# Altium PCB PCB.PcbDoc
Units mm, origin at the board's own origin, x right, y up, seen from the top; angles counter-clockwise.
Board outline 152.4 x 101.6 mm, 4 copper layers (L1(SIG), L2(GND), L3(PWR), L4(SIG)), stack 1.565 mm thick; 92 components, 74 nets, 381 pads, 117 vias.
Unrouted connection lines stored in the file: 155.
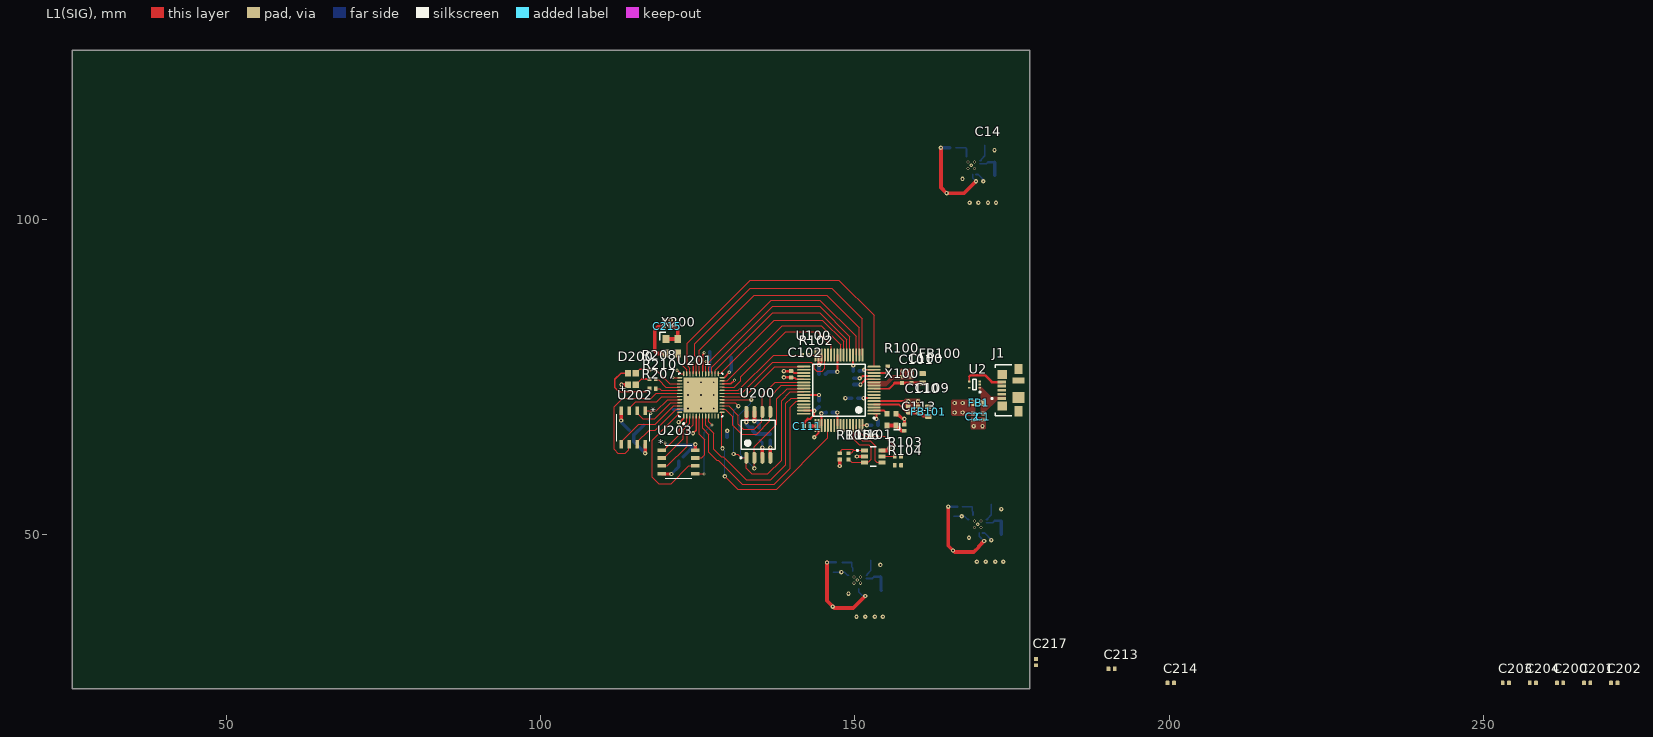
[diagram p0: L1(SIG) view]
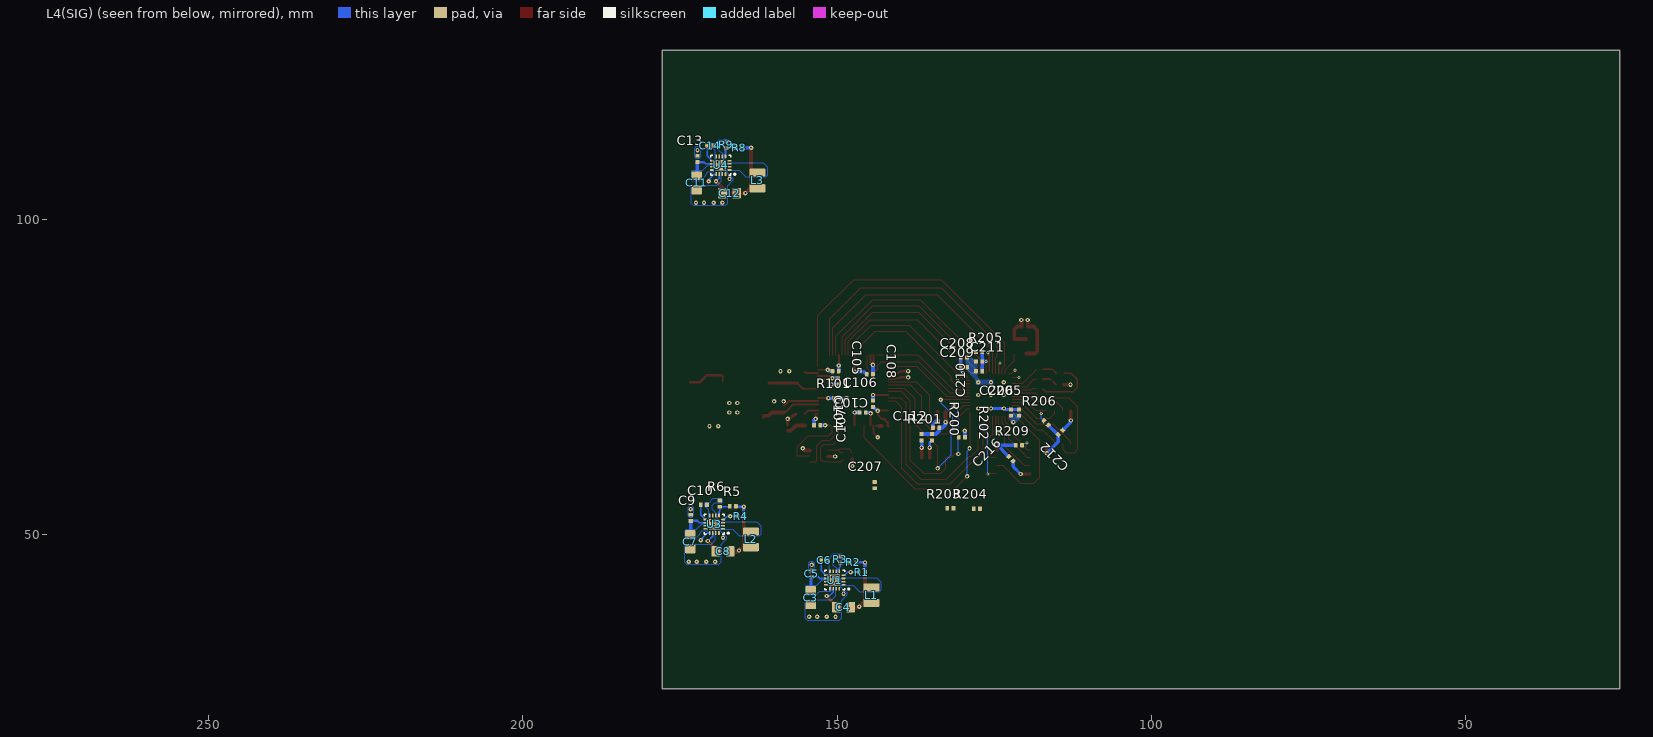
[diagram p1: L4(SIG) view, seen from below]
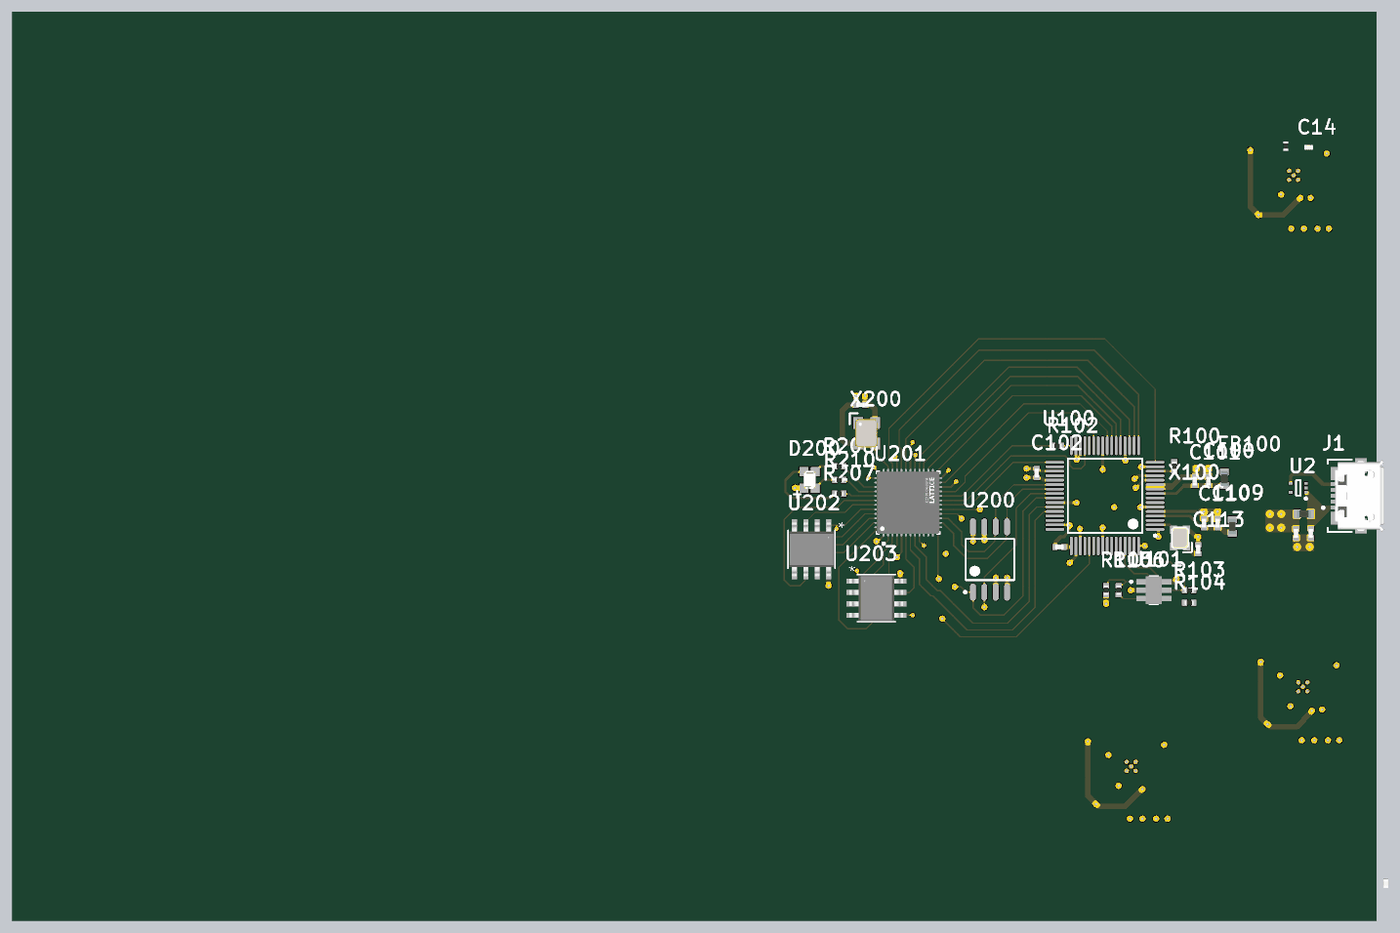
[diagram p2: 3D render of the assembled board from above, using the file's embedded part models]
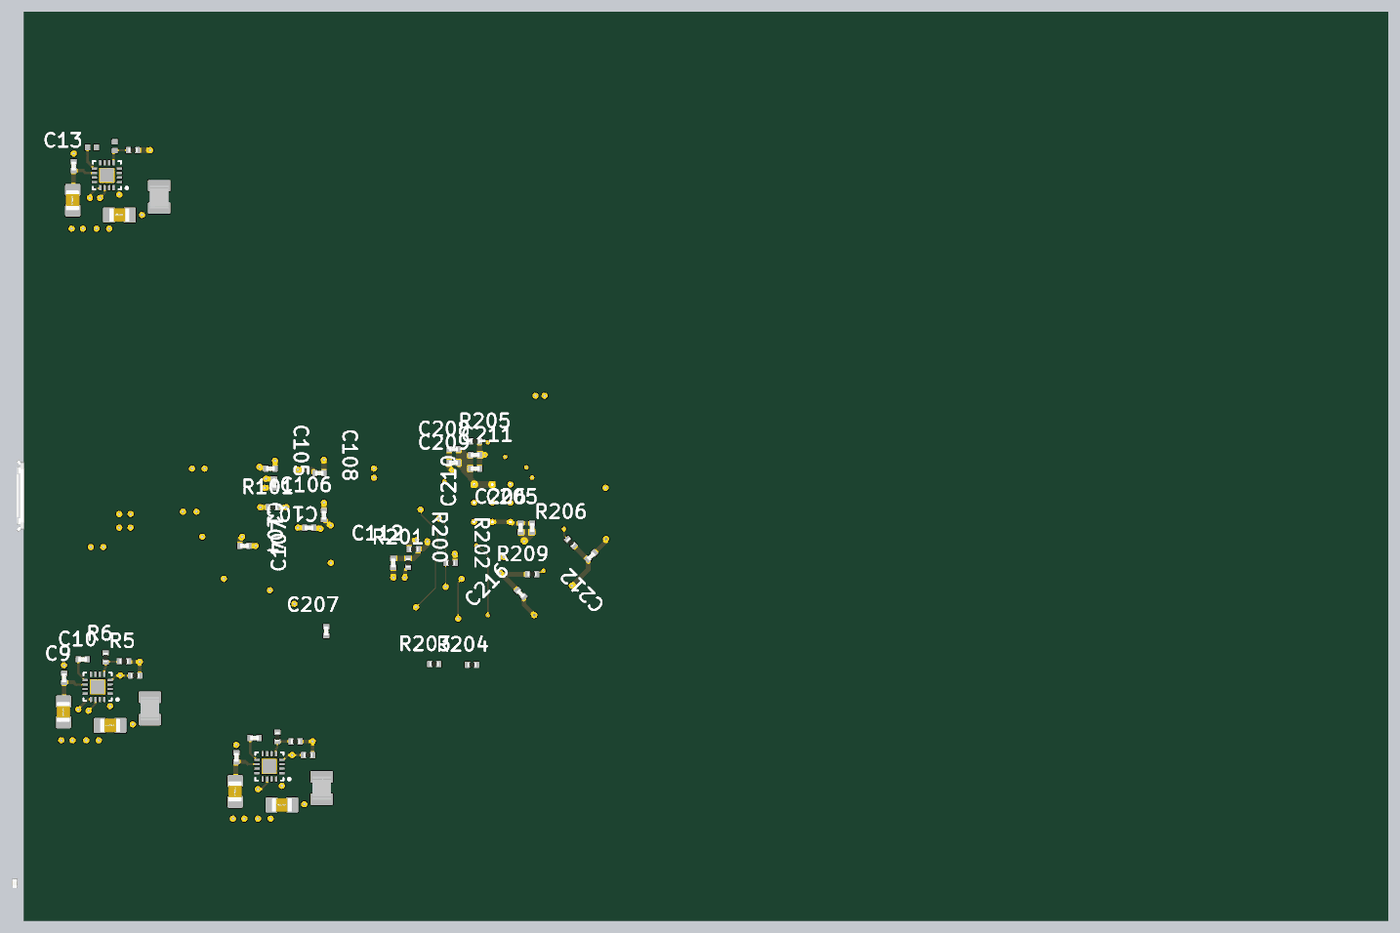
[diagram p3: 3D render of the assembled board from below, using the file's embedded part models]

## Layer stack, top to bottom
Top Solder: solder mask 0.0102, Solder Resist, Dk 3.5
L1(SIG): signal copper 0.0356
Dielectric 2: prepreg 0.0994, PP-006, Dk 4.1
L2(GND): signal copper 0.0152
Dielectric 1: dielectric 1.265, FR-4, Dk 4.8
L3(PWR): signal copper 0.0152
Dielectric 3: prepreg 0.0994, PP-006, Dk 4.1
L4(SIG): signal copper 0.0356
Bottom Solder: solder mask 0.0102, Solder Resist, Dk 3.5

## Board outline
25.4,25.4 177.8,25.4 177.8,127 25.4,127

## Design rules (kind name [scope] priority, off if disabled: settings)
Clearance [All] p1: gap=0.2 ignorepadtopadclearanceinfootprint=TRUE
DiffPairsRouting [All] p1: maxlimit=0.203 minlimit=0.127 mostfreqgap=0.203 toplayer_mingap=0.203 toplayer_minwidth=0.156 toplayer_maxwidth=0.156 toplayer_prefwidth=0.156 midlayer1_maxgap=0.127 midlayer1_prefgap=0.127 midlayer1_minwidth=0.105 midlayer1_maxwidth=0.105 midlayer1_prefwidth=0.105 midlayer2_maxgap=0.127 midlayer2_prefgap=0.127 midlayer2_minwidth=0.105 midlayer2_maxwidth=0.105 midlayer2_prefwidth=0.105 bottomlayer_mingap=0.203 bottomlayer_minwidth=0.156 bottomlayer_maxwidth=0.156 bottomlayer_prefwidth=0.156 impedanceprofiledriven=TRUE impedanceprofileid={D3CC2873-AD32-402A-ADF3-249A2D61D217} impedanceprofilevalue=90.000000 maxuncoupledlength=12.7
PolygonConnect [All] p1: connectstyle=Direct reliefconductorwidth=0.254 reliefentries=4 polygonreliefangle="90 Angle" airgapwidth=0.254
RoutingVias [All] p1: holewidth=0.3 width=0.45 viastyle="Through Hole" minholewidth=0.2 minwidth=0.4 maxholewidth=0.711 maxwidth=1.27
SolderMaskExpansion [All] p1: expansion=0.102 istentingtop=FALSE
SupplyNets "Schematic Supply Nets_5" [InNet('+1v8')] p1: voltage=0.000
SupplyNets "Schematic Supply Nets_2" [InNet('+5V')] p2: voltage=0.000
SupplyNets "Schematic Supply Nets_6" [InNet('+3v3')] p3: voltage=0.000
SupplyNets "Schematic Supply Nets_4" [InNet('GND')] p4: voltage=0.000
SupplyNets "Schematic Supply Nets_3" [InNet('+1v2')] p5: voltage=0.000
SupplyNets "Schematic Supply Nets_1" [InNet('+VBUS')] p6: voltage=0.000
SupplyNets "Schematic Supply Nets" [InNet('+2v5')] p7: voltage=0.000
Width [All] p1: maxlimit=1 minlimit=0.1 preferedwidth=0.15 toplayer_minwidth=0.12 bottomlayer_minwidth=0.12 minimp=50.000000 maximp=50.000000 favimp=50.000000
29 further rules are at their usual default settings.

## Classes and differential pairs
component class ice40: C200 C201 C202 C203 C204 C205 C206 C207 C208 C209 C210 C211 C212 C213 C214 C215 C216 C217 D200 R200 R201 R202 R203 R204 R205 R206 R207 R208 R209 R210 U200 U201 U202 U203 X200
component class Power: C1 C2 C3 C4 C5 C6 C7 C8 C9 C10 C11 C12 C13 C14 FB1 J1 L1 L2 L3 R1 R2 R3 R4 R5 R6 R8 R9 U1 U2 U3 U4
component class IO: C100 C101 C102 C103 C104 C105 C106 C107 C108 C109 C110 C111 C112 C113 FB100 FB101 R100 R101 R102 R103 R104 R105 R106 U100 U101 X100
differential pair USB_D: +USB_D_P -USB_D_N

## Components (designator, comment, footprint, x,y, rotation, side; value= is the part's Value field where it differs from the comment)
C1 "3u3" CAP_0402 170.434,68.707 r90 top
C2 "3u3" CAP_0402 168.783,68.707 r90 top
C3 "10u" CAP_0805 154.178,39.878 r90 bottom
C4 "22u" CAP_0805 148.971,38.354 r180 bottom
C5 "100n" CAP_0402 154.051,43.688 r270 bottom
C6 "3n3" CAP_0402 152.019,45.847 r180 bottom
C7 "10u" CAP_0805 173.355,48.768 r90 bottom
C8 "22u" CAP_0805 168.148,47.244 r180 bottom
C9 "100n" CAP_0402 173.293,52.57 r270 bottom
C10 "3n3" CAP_0402 171.209,54.64 r180 bottom
C11 "10u" CAP_0805 172.32,105.915 r90 bottom
C12 "22u" CAP_0805 167.113,104.264 r180 bottom
C13 "100n" CAP_0402 172.212,109.728 r270 bottom
C14 "3n3" CAP_0402 170.182,111.823 r180 bottom
C100 "4u7" CAP_0402 159.004,74.549 r270 top
C101 "100n" CAP_0402 157.48,74.549 r270 top
C102 "100n" CAP_0402 139.827,75.438 r270 top
C103 "100n" CAP_0402 149.86,74.295 r270 bottom
C104 "100n" CAP_0402 153.162,67.31 r180 bottom
C105 "100n" CAP_0402 150.241,75.946 r180 bottom
C106 "100n" CAP_0402 144.272,70.739 r90 bottom
C107 "100n" CAP_0402 145.923,69.342 r0 bottom
C108 "100n" CAP_0402 144.78,75.438 r180 bottom
C109 "4u7" CAP_0402 160.02,69.85 r270 top
C110 "100n" CAP_0402 158.496,69.85 r270 top
C111 "4u7" CAP_0402 142.367,67.183 r0 top
C112 "100n" CAP_0402 136.542,65.405 r90 bottom
C113 "100n" CAP_0402 157.861,66.929 r270 top
C200 "4u7" CAP_0402 262.255,26.289 r0 top
C201 "100n" CAP_0402 266.573,26.289 r0 top
C202 "100n" CAP_0402 270.891,26.289 r0 top
C203 "4u7" CAP_0402 253.619,26.289 r0 top
C204 "100n" CAP_0402 257.937,26.289 r0 top
C205 "4u7" CAP_0402 121.031,69.342 r270 bottom
C206 "100n" CAP_0402 122.301,69.342 r270 bottom
C207 "100n" CAP_0402 144.018,57.785 r90 bottom
C208 "4u7" CAP_0402 129.794,78.105 r0 bottom
C209 "100n" CAP_0402 129.794,76.581 r0 bottom
C210 "100n" CAP_0402 127.381,75.946 r180 bottom
C211 "100n" CAP_0402 127.381,77.47 r180 bottom
C212 "100n" CAP_0402 114.427,66.167 r315 bottom
C213 "4u7" CAP_0402 190.855,28.543 r0 top
C214 "100n" CAP_0402 200.279,26.289 r0 top
C215 "100n" CAP_0402 120.142,83.058 r180 top
C216 "100n" CAP_0402 122.301,61.976 r45 bottom
C217 "4u7" CAP_0402 178.816,29.591 r90 top
D200 "150080M153000" 150080M153000 114.474,74.676 r90 top
FB1 "120R" FB_0603 169.672,70.866 r180 top
FB100 "1K5" FB_0603 160.782,74.803 r270 top
FB101 "1K5" FB_0603 161.671,69.469 r270 top
J1 "473460001" FP-473460001-MFG 175.665,72.898 r90 top
L1 "2u2" IND_1008 144.526,40.259 r270 bottom
L2 "2u2" IND_1008 163.703,49.149 r270 bottom
L3 "2u2" IND_1008 162.668,106.296 r270 bottom
R1 "100K" RES_0402 146.05,43.942 r180 bottom
R2 "75K" RES_0402 147.447,45.466 r180 bottom
R3 "150K" RES_0402 149.479,45.974 r270 bottom
R4 "100K" RES_0402 165.354,52.832 r180 bottom
R5 "16K" RES_0402 166.597,54.423 r180 bottom
R6 "50K" RES_0402 168.654,54.832 r270 bottom
R8 "390K" RES_0402 165.589,111.503 r180 bottom
R9 "180K" RES_0402 167.636,111.964 r270 bottom
R100 "10K" RES_0402 155.194,76.2 r90 top
R101 "10K" RES_0402 149.987,71.628 r180 bottom
R102 "22R" RES_0402 142.113,78.486 r180 top
R103 "10K" RES_0402 156.845,62.357 r180 top
R104 "10K" RES_0402 156.845,60.96 r180 top
R105 "10K" RES_0402 147.574,62.357 r90 top
R106 "2K2" RES_0402 148.971,62.357 r270 top
R200 "10K" RES_0402 134.239,66.929 r180 bottom
R201 "10K" RES_0402 134.874,65.405 r90 bottom
R202 "10K" RES_0402 130.123,65.405 r180 bottom
R203 "10K" RES_0402 131.953,54.102 r180 bottom
R204 "10K" RES_0402 127.746,54.035 r180 bottom
R205 "100R" RES_0402 127.381,78.994 r180 bottom
R206 "10K" RES_0402 116.713,67.691 r225 bottom
R207 "220R" RES_0402 117.776,73.152 r180 top
R208 "100R" RES_0402 117.776,76.2 r180 top
R209 "10K" RES_0402 121.031,64.135 r0 bottom
R210 "100R" RES_0402 117.776,74.676 r180 top
U1 "TPS62130RGTR" RGT0016C_V 150.368,42.672 r0 bottom
U2 "TPD2E001DRLRG4" DRL0005A_L 169.037,73.787 r180 top
U3 "TPS62130RGTR" RGT0016C_V 169.545,51.562 r0 bottom
U4 "TPS62130RGTR" RGT0016C_V 168.51,108.709 r0 bottom
U100 "FT2232HL-Reel" LQFP-64_M 147.447,72.898 r180 top
U101 "93LC56BT-I/OT" FP-C04-028-MFG 152.908,62.357 r0 top
U200 "W25Q128JVSIQ" WINB-SOIC-8_M 134.614,65.785 r90 top
U201 "iCE40UP5K-SG48I" FP-QFN-48-IPC_C 125.476,72.136 r90 top
U202 "APS1604M-3SQR-SN" SOP8L_APS1604M-3SQR-SN_APY 114.681,66.929 r270 top
U203 "APS1604M-3SQR-SN" SOP8L_APS1604M-3SQR-SN_APY 121.92,61.468 r0 top
X100 "12Mhz" XTAL_2520 155.829,68.199 r90 top
X200 "12Mhz" XTAL_3225 120.838,79.89 r270 top

## Footprints (in the part's own frame and the unit in brackets; to place one, negate y for a bottom-side part, rotate by r counter-clockwise, add the part's x,y. Pads: shape width x height; smd on the part's side, far side on the other; paste and mask are expansions set on the pad)
150080M153000 [mm]
  rect 1x1 smd mask+0.15: 1(0.925,0.625) 2(0.925,-0.625) 3(-0.925,-0.625) 4(-0.925,0.625)
  body extent -1,-0.65 1,0.65, height 0.51
CAP_0402 [mm]
  rrect25% 0.6x0.7 smd: 1(-0.5,0) 2(0.5,0)
  body extent -0.5,-0.26 0.5,0.26, height 0.37
CAP_0805 [mm]
  rrect25% 1.4x1.7 smd: 1(-1.143,0) 2(1.143,0)
  body extent -1.15,-0.76 1.15,0.79, height 1.01
DRL0005A_L [mm] "SOT23, 5-Leads, Body 1.7x1.3mm, Pitch 0.5mm, IPC High Density"
  rect 0.4x0.3 smd: 1(-0.85,0.5) 2(-0.85,0) 3(-0.85,-0.5) 4(0.85,-0.5) 5(0.85,0.5)
  silkscreen extent -0.98,-0.85 0.25,1.32, body extent -0.65,-0.85 0.65,0.85, height 0.6
FB_0603 [mm]
  rrect25% 0.8x1 smd: 1(-0.75,0) 2(0.75,0)
  body extent -0.8,-0.4 0.8,0.4, height 0.81
FP-473460001-MFG [mm]
  rect 0.45x1.38 smd paste+0 mask+0: 1(-1.3,2.31) 2(-0.65,2.31) 3(0,2.31) 4(0.65,2.31) 5(1.3,2.31)
  rect 1.425x1.55 smd paste+0 mask+0: 6(-2.488,2.225) 7(2.488,2.225)
  rect 1.65x1.3 smd paste+0 mask+0: 8(-3.375,-0.35) 11(3.375,-0.35)
  rect 1.8x1.9 smd paste+0 mask+0: 9(-1.15,-0.35)
  rect 1x1.9 smd paste+0 mask+0: 10(1.55,-0.35)
  silkscreen extent -4.05,0.67 4.05,3.97, body extent -4.3,-2.48 4.3,3.45, height 0.25
FP-C04-028-MFG [mm]
  rect 1.1x0.6 smd paste+0 mask+0: 1(-1.4,0.95) 2(-1.4,0) 3(-1.4,-0.95) 4(1.4,-0.95) 5(1.4,0) 6(1.4,0.95)
  silkscreen extent -2.65,-1.55 0.48,1.55, body extent -2.05,-1.88 2.05,1.88, height 0.25
FP-QFN-48-IPC_C [mm]
  rect 0.808x0.192 smd paste+0 mask+0: 1(-3.375,2.75)
  rrect100% 0.808x0.192 smd paste+0 mask+0: 2(-3.375,2.25) 3(-3.375,1.75) 4(-3.375,1.25) 5(-3.375,0.75) 6(-3.375,0.25) 7(-3.375,-0.25) 8(-3.375,-0.75) 9(-3.375,-1.25) 10(-3.375,-1.75) 11(-3.375,-2.25) 12(-3.375,-2.75) 25(3.375,-2.75) 26(3.375,-2.25) 27(3.375,-1.75) 28(3.375,-1.25) 29(3.375,-0.75) 30(3.375,-0.25) 31(3.375,0.25) 32(3.375,0.75) 33(3.375,1.25) 34(3.375,1.75) 35(3.375,2.25) 36(3.375,2.75)
  rrect100% 0.192x0.808 smd paste+0 mask+0: 13(-2.75,-3.375) 14(-2.25,-3.375) 15(-1.75,-3.375) 16(-1.25,-3.375) 17(-0.75,-3.375) 18(-0.25,-3.375) 19(0.25,-3.375) 20(0.75,-3.375) 21(1.25,-3.375) 22(1.75,-3.375) 23(2.25,-3.375) 24(2.75,-3.375) 37(2.75,3.375) 38(2.25,3.375) 39(1.75,3.375) 40(1.25,3.375) 41(0.75,3.375) 42(0.25,3.375) 43(-0.25,3.375) 44(-0.75,3.375) 45(-1.25,3.375) 46(-1.75,3.375) 47(-2.25,3.375) 48(-2.75,3.375)
  rect 5.5x5.5 smd paste-1000 mask+0: 49(0,0)
  silkscreen extent -4.7,-3.5 3.5,3.5, body extent -3.88,-3.88 3.88,3.88, height 0.25
IND_1008 [mm]
  rrect25% 1.3x2.54 smd: 1(-1.25,0) 2(1.25,0)
  body extent -1.3,-1.05 1.3,1.05, height 1.71
LQFP-64_M [mm] "Thin QFP, 64-Leads, Body 10x10mm, Pitch 0.5mm, IPC Low Density"
  oval 2.1x0.3 smd: 1(-5.6,3.75) 2(-5.6,3.25) 3(-5.6,2.75) 4(-5.6,2.25) 5(-5.6,1.75) 6(-5.6,1.25) 7(-5.6,0.75) 8(-5.6,0.25) 9(-5.6,-0.25) 10(-5.6,-0.75) 11(-5.6,-1.25) 12(-5.6,-1.75) 13(-5.6,-2.25) 14(-5.6,-2.75) 15(-5.6,-3.25) 16(-5.6,-3.75) 33(5.6,-3.75) 34(5.6,-3.25) 35(5.6,-2.75) 36(5.6,-2.25) 37(5.6,-1.75) 38(5.6,-1.25) 39(5.6,-0.75) 40(5.6,-0.25) 41(5.6,0.25) 42(5.6,0.75) 43(5.6,1.25) 44(5.6,1.75) 45(5.6,2.25) 46(5.6,2.75) 47(5.6,3.25) 48(5.6,3.75)
  oval 0.3x2.1 smd: 17(-3.75,-5.6) 18(-3.25,-5.6) 19(-2.75,-5.6) 20(-2.25,-5.6) 21(-1.75,-5.6) 22(-1.25,-5.6) 23(-0.75,-5.6) 24(-0.25,-5.6) 25(0.25,-5.6) 26(0.75,-5.6) 27(1.25,-5.6) 28(1.75,-5.6) 29(2.25,-5.6) 30(2.75,-5.6) 31(3.25,-5.6) 32(3.75,-5.6) 49(3.75,5.6) 50(3.25,5.6) 51(2.75,5.6) 52(2.25,5.6) 53(1.75,5.6) 54(1.25,5.6) 55(0.75,5.6) 56(0.25,5.6) 57(-0.25,5.6) 58(-0.75,5.6) 59(-1.25,5.6) 60(-1.75,5.6) 61(-2.25,5.6) 62(-2.75,5.6) 63(-3.25,5.6) 64(-3.75,5.6)
  silkscreen extent -5.72,-4.15 4.15,4.57, body extent -5,-5 5,5, height 1.6
RES_0402 [mm]
  rrect25% 0.6x0.7 smd: 1(-0.5,0) 2(0.5,0)
  body extent -0.5,-0.25 0.5,0.25, height 0.3
RGT0016C_V [mm] "QFN, 16-Leads, Body 3x3mm, Pitch 0.5mm, Thermal Pad 1.65x1.65mm"
  rrect40% 0.6x0.25 smd: 1(-1.4,0.75) 2(-1.4,0.25) 3(-1.4,-0.25) 4(-1.4,-0.75) 9(1.4,-0.75) 10(1.4,-0.25) 11(1.4,0.25) 12(1.4,0.75)
  rrect40% 0.25x0.6 smd: 5(-0.75,-1.4) 6(-0.25,-1.4) 7(0.25,-1.4) 8(0.75,-1.4) 13(0.75,1.4) 14(0.25,1.4) 15(-0.25,1.4) 16(-0.75,1.4)
  rrect6% 1.55x1.55 on Bottom Paste: 17(0,0)
  rrect6% 1.7x1.7 smd paste-0.85: 17(0,0)
  silkscreen extent -2.35,-1.57 1.57,1.58, body extent -1.5,-1.5 1.5,1.5, height 1
SOP8L_APS1604M-3SQR-SN_APY [mil]
  rect 53.5x22 smd paste+0 mask+0: 1(-105.25,75) 2(-105.25,25) 3(-105.25,-25) 4(-105.25,-75) 5(105.25,-75) 6(105.25,-25) 7(105.25,25) 8(105.25,75)
  silkscreen extent -84,-104 84,104, body extent -118,-99 118,99, height 69
WINB-SOIC-8_M [mm] "SOIC, 8-Leads, Body 5.4x5.4mm, Pitch 1.27mm, IPC Low Density"
  oval 1.9x0.65 smd: 1(-3.65,1.905) 2(-3.65,0.635) 3(-3.65,-0.635) 4(-3.65,-1.905) 5(3.65,-1.905) 6(3.65,-0.635) 7(3.65,0.635) 8(3.65,1.905)
  silkscreen extent -3.77,-2.7 2.3,2.9, body extent -2.7,-2.7 2.7,2.7, height 2.16
XTAL_2520 [mm]
  rrect10% 0.9x0.8 smd mask+0: 1(-0.925,-0.725) 2(0.925,-0.725) 3(0.925,0.725) 4(-0.925,0.725)
  silkscreen extent -1.6,-1.33 -0.54,-0.36, body extent -1.25,-1 1.25,1, height 0.8
XTAL_3225 [mm]
  rrect10% 1.3x1.1 smd: 1(-1.15,-0.95) 2(1.15,-0.95) 3(1.15,0.95) 4(-1.15,0.95)
  silkscreen extent -2.23,-1.89 -1,-1, body extent -1.6,-1.28 1.6,1.22, height 0.61

## Part data
C1 C2 C5 C6 C9 C10 C13 C14 C100 C101 C102 C103 C104 C105 C106 C107 C108 C109 C110 C111 C112 C113 C200 C201 C202 C204 C206 C207 C209 C210 C211 C212 C214 C215 C216 C217: library part CAP_0402, "Capacitor SMD 0402"
C3 C4 C7 C8 C11 C12: library part CAP_0805, "Capacitor SMD 0805"
C203 C205 C208 C213: library part CAP_0402, "Capacitor SMD 0402", Manufacturer Part Number=GRM155R61E475ME15D
D200: "RGB LED Common Anode SMD Diffused 0805 Top View", Manufacturer=Wurth, Distributor Link=https://www.mouser.de/ProductDetail/Wurth-Elektronik/150080M153000?qs=5aG0NVq1C4wI5cZ2wabu5A%3D%3D, Manufacturer Part Number=150080M153000
FB1 FB100 FB101: library part FB_0603, "Ferrite Bead SMD 0603"
J1: library part CMP-2000-05246-2, "CONN RCPT USB2.0 MICRO B SMD R/A", Current Rating=1.8A, Manufacturer=Molex, Package=0, Temperature="-30°C to +85°C", Temperature Range High=+85°C, Temperature Range Low=-30°C, Voltage Rating=30V, Automotive=No, Category=Conn, ComponentLink2Description=Datasheet, ComponentLink2URL=https://www.molex.com/webdocs/datasheets/pdf/en-us/0473460001_IO_CONNECTORS.pdf, Conn Orientation="Right Angle", Contact Material=Gold,Nickel, Device Class L1=Connectors, Device Class L2="USB Connectors", Device Class L3=unset, Digikey Description="CONN RCPT USB2.0 MICRO B SMD R/A", Footprint Url=https://www.molex.com/pdm_docs/sd/473460001_sd.pdf, Height=2.945mm, Is Female=yes, Lead Free=Yes, Manufacturer Part Number=473460001, Number Of Contacts=5, Octopart=https://octopart.com/47346-0001-molex-7164928, Pitch=0.65mm, RoHS=TRUE, Shielding=true, Usb Standard="USB 2.0"
L1 L2 L3: library part IND_1008, "Inductor SMD 1008"
R1 R2 R3 R4 R5 R6 R8 R9 R100 R101 R102 R103 R104 R105 R106 R200 R201 R202 R203 R204 R205 R206 R207 R208 R209 R210: library part RES_0402, "Resistor SMD 0402"
U1 U3 U4: library part CMP-0323-00115-3, "Buck Step Down Regulator with 3 to 17 V Input and 0.9 to 6 V Output, -40 to 85 degC, 16-Pin QFN (RGT), Green (RoHS & no Sb/Br)", Manufacturer="Texas Instruments", Rating=Catalog, Switch Current Limit(Typ)(A)=4.2, Code_JEDEC=MO-220, ComponentLink1Description=Datasheet, ComponentLink1URL=http://www.ti.com/general/docs/lit/getliterature.tsp?genericPartNumber=TPS62130&fileType=pdf, ComponentLink2Description="Package Specification", ComponentLink2URL=http://www.ti.com/litv/pdf/mpqf119g, ComponentLink3Description="URL Link1", ComponentLink3URL="Samples URL:http://www.ti.com/product/tps62130#samples", DatasheetVersion=SLVSAG7, Duty Cycle(Max)(%)=100, Eco-Plan="Green (RoHS & no Sb/Br)", Iout(Max)(A)=3, Iq(Typ)(mA)=0.017, Mounting Technology="Surface Mount", PackageDescription="16-Pin Plastic Quad Flat No-Lead, 3 x 3 mm Body, 0.5 mm Pitch, 1.7 x 1.7 mm Exposed Pad", PackageReference=RGT0016C, PackageVersion="revH, Oct-2011", PartNumber=TPS62130RGTR, Regulated Outputs(#)=1, SubFamily="Step-Down Regulator", Synchronous Rectification=TRUE, Topology=Buck, Vin(Max)(V)=17, Vin(Min)(V)=3, Vout(Max)(V)=6, Vout(Min)(V)=0.9
U2: library part CMP-0326-00050-2, "Low-Capacitance + / - 15 kV ESD-Protection Array for High-Speed Data Interfaces, 2 Channels, -40 to +85 degC, 5-pin SOT (DRL), Green (RoHS & no Sb/Br)", Breakdown Voltage(Min)(V)=11, IO Capacitance(Typ)(pF)=1.5, IO Leakage Current(nA)=1, Manufacturer="Texas Instruments", ComponentLink1Description="Manufacturer URL", ComponentLink1URL=http://www.ti.com/, ComponentLink2Description=Datasheet, ComponentLink2URL=http://www.ti.com/general/docs/lit/getliterature.tsp?genericPartNumber=TPD2E001&fileType=pdf, ComponentLink3Description="URL Link1", ComponentLink3URL=SamplesURL:http://www.ti.com/product/tpd2e001#samples, DatasheetVersion=SLLS684F, Eco-Plan="Green (RoHS & no Sb/Br)", IEC 61000-4-2 Air-Gap(+/- kV)=15, IEC 61000-4-2 Contact(+/- kV)=8, Mounting Technology="Surface Mount", PackageDescription="5-Pin Plastic Small Outline, Flat Lead 0.5 mm Pitch", PackageReference=DRL0005A, PackageVersion="revD, Aug-2007", PartNumber=TPD2E001DRLRG4, SubFamily="ESD Solution", USB High Speed=TRUE
U100: library part CMP-0078-00023-3, "Dual High Speed USB To Multipurpose UART/FIFO IC, 64-pin LQFP, Tape and Reel", Manufacturer=FTDI, ComponentLink1Description="Manufacturer URL", ComponentLink1URL=http://www.ftdichip.com/, ComponentLink2Description=Datasheet, ComponentLink2URL=http://www.ftdichip.com/Support/Documents/DataSheets/ICs/DS_FT2232H.pdf, DatasheetVersion="ver 2.21, Jun-2012", PackageDescription="64-Pin Thin Quad Flat Pack, 10 x 10 x 1.4 mm Body, 0.5 mm Pitch", PackageReference=LQFP-64, PackageVersion=Jun-12, PartNumber=FT2232HL-Reel, RevisionNote="DatasheetVersion updated to 2.21 Jun-2012"
U101: library part CMP-0162-00356-2, "IC EEPROM 2K SPI 2MHZ SOT23-6", Case/Package=SOT-23, Frequency=2MHz, Max Operating Temperature=85°C, Max Supply Voltage=5.5V, Min Operating Temperature=-40°C, Min Supply Voltage=2.5V, Nominal Supply Current=2mA, Package Quantity=3000, Access Time=250ns, Contact Plating=Tin, Density=2Kb, Height=1.3mm, Interface=Serial, Lead Free="Lead Free", Length=3.1mm, Max Frequency=2MHz, Memory Size=2Kb, Memory Type=EEPROM, Mount="Surface Mount", Number of Pins=6, Packaging="Tape and Reel", Radiation Hardening=No, REACH SVHC="No SVHC", Width=1.8mm
U200: library part CMP-2000-05005-1, "3V 128M-Bit Serial Flash Memory with Dual/Quad SPI & QPI, 2.7 to 3.6 V, -40 to 85 degC, 8-Pin SOIC, RoHS, Tape and Reel", Manufacturer=Winbond, Operating Supply Voltage (Max)=3.6V, Operating Supply Voltage (Min)=2.7V, Operating Supply Voltage (Typ)=3/3.3V, Operating Temp Range=-40Cto85C, Operating Temperature (Max)=85C, Operating Temperature (Min)=-40C, Operating Temperature Classification=Industrial, Package Description="8-Pin Small Outline Integrated Circuit, Body 5.28 x 5.28 mm, Pitch 1.27 mm", Package Reference=SS-8, Package Type=SOICW, Program/Erase Volt (Typ)=2.7to3.6V, Supply Current=20mA, Access Time (Max)=7ns, Address Bus=24b, Boot Type=NotRequired, Cell Type=NOR, Datasheet URL=http://download.siliconexpert.com/pdfs/2015/11/30/6/42/17/890/win_/manual/3w25q128fv20rev.l2008242015.pdf, Datasheet Version="Rev. L, 08/2015", Density=134217728Bit, Interface Type=Serial(SPI), Manufacturer URL=http://www.winbond.com/hq/index.html?__locale=en, Mounting=SurfaceMount, Number of Words=16777216, Pin Count=8, Programmable=Yes, Rad Hardened=No, Sync/Async=Synchronous, Word Size=8b
U201: library part CMP-17932-000001-1, "ICE40-ULTRAPLUS, 5280 LUTS, 1.2V", Frequency=48MHz, Manufacturer=Lattice, Max Junction Temp=+100°C, Max Supply Voltage=3.46V, Min Supply Voltage=1.14V, Nominal Supply Current=2.5-12mA, Package=QFN-48, Temperature="-40°C to +100°C", Temperature Range Low=-40°C, Automotive=No, Category=IC, ComponentLink2Description=Datasheet, ComponentLink2URL=http://www.latticesemi.com/view_document?document_id=51968, Device Class L1="Integrated Circuits (ICs)", Device Class L2="Embedded Processors and Controllers", Device Class L3="FPGAs - Field Programmable Gate Arrays", Digikey Description="ICE40-ULTRAPLUS, 5280 LUTS, 1.2V", Footprint Url=http://www.latticesemi.com/view_document?document_id=213, Height=1mm, Ipc Land Pattern Name=QFN50P700X700X90-48, Lead Free=Yes, Manufacturer Part Number=iCE40UP5K-SG48I, Number Of I/Os=39, Number Of Logic Blocks=660, Number Of Logic Elements Cells=5280, Octopart=https://octopart.com/ice40up5k-sg48i-lattice+semiconductor-87369311, Propagation Delay=9ns, Ram Size=1024Kbits, RoHS=TRUE, Standoff Height=0mm, Temperature Range High=+100°C
U202 U203: "No Description Available", Mfr_Name="AP Memory", RefDes=RefDes, Type=Type
X100: library part XTAL_2520, "Crystal SMD 2520"
X200: library part TSX-3225_24.0000MF15X-AC, "Crystal SMD 24MHz 10PPM 7pF 3225", Manufacturer=Epson, Manufacturer Part Number="TSX-3225 24.0000MF15X-AC"

## Via types
v1: diameter 0.7, hole 0.3, L1(SIG) to L4(SIG), 91 vias
v2: diameter 0.5, hole 0.3, L1(SIG) to L4(SIG), 15 vias
v3: diameter 0.5, hole 0.2, L1(SIG) to L4(SIG), 11 vias

## Nets (pads, with @x,y where several pads share a name; then routed paths per layer and width w, separated by ;. In a path a pad name is that pad's centre, name@x,y a point inside that pad or via, vN(x,y) a via of type N, cw(c..) or ccw(c..) an arc to the next point about the centre after c; other vN are vias at no path point)
+1v2: C4.2 C200.2 C201.2 C202.2 L1.2 R1.2 R2.2 R205.1 U1.14 U201.5 U201.30 | length 24.3
  L1(SIG) w0.2: v1(124.206,66.04) 124.726,66.56 U201.5 ; U201.30@125.726,75.815 125.726,78.528 125.984,78.786 v3(125.984,78.867)
  L1(SIG) w0.6: v1(145.542,45.466) 145.542,39.374 v1(146.466,38.451) 146.493,38.451 146.716,38.227 149.733,38.227 v1(151.638,40.132)
  L4(SIG) w0.25: U1.14 150.618,40.771 151.257,40.132 v1(151.638,40.132)
  L4(SIG) w0.4: R1.2 145.546,43.946 145.546,45.462 v1(145.542,45.466) R2.2
+1v8: C102.2 C103.2 C104.2 C111.2 U100.12 U100.37 U100.49 U100.64 | length 9.3
  L1(SIG) w0.3: C102.2 139.898,74.867 140.398,74.867 140.617,74.648 U100.37 ; 143.256,67.183 143.697,67.183 U100.49 ; v1(150.876,73.787) 151.737,74.648 U100.12 ; U100.64 151.197,67.31 v1(151.892,67.31)
  L1(SIG) w0.4: v1(138.684,74.93) 138.688,74.934 139.823,74.934 C102.2
  L1(SIG) w0.6: C111.2 143.256,67.183
  L4(SIG) w0.6: C103.2 149.91,73.795 149.918,73.787 v1(150.876,73.787) ; v1(151.892,67.31) C104.2
+2v5: C12.2 C208.2 C209.2 L3.2 R8.2 U4.14 U201.24 | length 19.5
  L1(SIG) w0.2: U201.24@129.155,74.89 129.987,75.721 v3(129.987,75.766)
  L1(SIG) w0.6: v1(163.68,111.507) 163.68,105.179 v1(164.592,104.267) 167.37,104.267 v1(169.272,106.169)
  L4(SIG) w0.25: U4.14 168.76,106.681 v1(169.272,106.169)
  L4(SIG) w0.6: v3(129.987,75.766) 130.294,76.074 C209.2 C208.2 ; v1(163.68,111.507) 165.089,111.507 R8.2
+3v3: C8.2 C105.2 C106.2 C107.2 C108.2 C112.2 C113.2 C203.2 C204.2 C205.2 C206.2 C207.2 C212.2 C213.2 C214.2 C215.1 C216.2 C217.2 D200.4 FB100.1 FB101.1 L2.2 R4.2 R5.2 R100.2 R103.1 R104.1 R105.1 R200.2 R201.2 R202.2 R203.1 R204.1 R206.2 R209.2 U3.14 U100.20 U100.30 U100.31 U100.42 U100.50 U100.56 U101.6 U200.8 U201.1 U201.22 U201.33 U202.8 U203.8 X100.1 X100.4 X200.1 X200.4 | length 72.2
  L1(SIG) w0.2: v1(121.92,67.818) 122.016,67.914 122.179,67.914 U201.1@122.722,68.457 ; v3(124.032,77.25) 124.032,77.168 124.226,76.974 U201.33 ; U201.22 130.225,73.886 v3(130.836,74.497)
  L1(SIG) w0.3: U100.42 144.26,72.148 v1(144.272,72.136) ; v1(143.51,65.405) 144.197,66.092 U100.50 ; U100.31 144.197,77.135 144.287,77.045 v1(144.287,76.936) 144.697,77.347 U100.30 ; 147.193,68.961 147.197,68.957 U100.56 ; U100.20 149.697,76.871 v1(149.733,76.835)
  L1(SIG) w0.55: v1(116.586,62.865) U202.8 ; v1(124.587,64.262) 124.59,64.259 124.59,63.376 U203.8
  L1(SIG) w0.6: v1(112.823,73.787) 112.841,73.769 113.831,73.769 D200.4 ; X200.1 X200.4 121.788,82.555 121.303,83.04 C215.1@120.642,83.04 ; C215.1 120.642,84.066 v1(120.65,84.074) ; U200.8 132.712,69.432 132.712,67.821 v1(132.715,67.818) ; v1(147.574,60.833) R105.1 ; U101.6 155.101,63.307 155.421,63.627 v1(155.448,63.627) ; X100.4 X100.1 ; X100.1@156.554,67.224 156.654,67.124 156.704,67.124 157.399,66.429 C113.2 ; v1(164.846,54.356) 164.846,48.137 165.643,47.341 165.67,47.341 165.893,47.117 168.91,47.117 169.693,47.9 169.693,48 170.561,48.868 v1(170.561,48.895)
  L4(SIG) w0.25: U3.14 169.795,49.661 v1(170.561,48.895)
  L4(SIG) w0.4: R4.2 164.85,52.836 164.85,54.352 v1(164.846,54.356) R5.2@166.251,54.356
  L4(SIG) w0.55: R206.2 114.871,65.849 114.816,65.849 C212.2 114.745,65.778 114.745,65.743 114.781,65.707 114.781,64.67 v1(116.586,62.865) ; R209.2 124.419,64.135 124.546,64.262 v1(124.587,64.262) C216.2
  L4(SIG) w0.6: R202.2 129.623,66.35 129.667,66.394 v1(129.667,66.421) ; v1(132.715,67.818) 132.734,67.799 132.734,67.418 133.173,66.979 133.739,66.979 R200.2 133.739,66.413 134.247,65.905 R201.2 C112.2@136.525,65.905 ; C106.2 v1(144.272,72.136) ; C108.2@144.272,75.43 144.279,75.43 144.279,76.929 v1(144.287,76.936) ; C107.2 v1(147.193,69.342) ; v1(149.733,76.835) 149.741,76.827 C105.2
  other v1: 165.608,47.371
+5V: C2.2 C3.2 C5.2 C7.2 C9.2 C11.2 C13.2 FB1.2 U1.10 U1.11 U1.12 U1.13 U3.10 U3.11 U3.12 U4.10 U4.11 U4.12 | length 13.9
  L4(SIG) w0.25: U1.10 152.777,42.922 ; U4.10 170.919,108.959 ; U3.10 171.954,51.812
  L4(SIG) w0.3: 152.777,42.922 153.043,43.188 ; 170.919,108.959 171.185,109.225 ; 171.954,51.812 172.22,52.078
  L4(SIG) w0.4: 153.043,43.188 C5.2 ; 171.185,109.225 C13.2@172.193,109.225 ; 172.22,52.078 C9.2@173.228,52.078
  L4(SIG) w0.5: C5.2 154.065,43.188 154.114,43.138 154.114,41.084 C3.2 ; C13.2@172.193,109.225 172.207,109.225 172.257,109.175 172.257,107.121 C11.2 ; C9.2@173.228,52.078 173.241,52.078 173.291,52.028 173.291,49.974 C7.2
  other v1: 165.862,69.342 167.132,69.342 165.862,70.866 167.132,70.866
+VBUS: C1.2 FB1.1 J1.1 U2.1
APS1_SPI_D0: U201.46 U202.5 | length 12.1
  L1(SIG) w0.15: U202.5 112.776,64.656 115.557,67.437 118.161,67.437 121.11,70.386 U201.46
APS1_SPI_D1: U201.45 U202.2 | length 8.6
  L1(SIG) w0.15: U202.2 115.316,69.202 116.192,68.326 118.11,68.326 120.67,70.886 U201.45
APS1_SPI_D2: U201.43 U202.3 | length 9.2
  L1(SIG) w0.15: U202.3 114.046,70.002 115.09,71.046 118.417,71.046 119.257,71.886 U201.43
APS1_SPI_D3: U201.47 U202.7 | length 9.4
  L1(SIG) w0.15: U202.7 115.316,64.656 117.208,66.548 118.237,66.548 121.575,69.886 U201.47
APS1_SPI_SCK: U201.42 U202.6 | length 21.8
  L1(SIG) w0.15: U202.6 113.985,64.195 113.985,63.439 113.411,62.865 112.268,62.865 111.633,63.5 111.633,70.231 113.03,71.628 117.602,71.628 118.36,72.386 U201.42
APS1_SPI_SS: R206.1 U201.44 U202.1 | length 8
  L1(SIG) w0.15: U202.1 117.488,69.602 ; v3(117.475,69.215) 117.488,69.228 117.488,69.602 ; U201.44 120.174,71.386 118.39,69.602 117.488,69.602
  L4(SIG) w0.15: R206.1 117.475,68.453 v3(117.475,69.215)
APS2_SPI_D0: U201.9 U203.5 | length 11.4
  L1(SIG) w0.15: U203.5 v3(125.984,59.563) ; U201.9 126.726,67.86 v3(127.244,67.342)
  L4(SIG) w0.15: v3(125.984,59.563) 125.984,66.167 127.159,67.342 v3(127.244,67.342)
APS2_SPI_D1: U201.3 U203.2 | length 8.7
  L1(SIG) w0.15: U203.2 119.647,62.103 122.682,65.138 122.682,66.595 123.693,67.606 123.693,68.409 123.726,68.442 U201.3
APS2_SPI_D2: U201.4 U203.3 | length 10.5
  L1(SIG) w0.15: U203.3 120.142,60.833 123.317,64.008 123.317,66.471 124.226,67.38 U201.4
APS2_SPI_D3: U201.6 U203.7 | length 8.2
  L1(SIG) w0.15: U203.7 125.603,62.103 126.111,62.611 126.111,64.982 125.226,65.867 U201.6
APS2_SPI_SCK: U201.48 U203.6 | length 20.7
  L1(SIG) w0.15: U201.48 121.888,69.386 121.868,69.366 121.868,69.036 117.729,64.897 117.729,59.055 118.745,58.039 120.777,58.039 123.571,60.833 U203.6
APS2_SPI_SS: R209.1 U201.2 U203.1 | length 9
  L1(SIG) w0.15: U203.1 119.647,63.373 120.148,63.875 ; v3(119.761,64.516) 119.82,64.457 119.82,64.203 120.148,63.875 ; U201.2 123.226,67.854 122.047,66.675 122.047,65.773 120.148,63.875
  L4(SIG) w0.15: v3(119.761,64.516) 119.856,64.516 120.006,64.366 120.306,64.366 120.531,64.141 R209.1
BB_UART: U100.53 U201.13 | length 33.1
  L1(SIG) w0.15: U201.13 128.818,69.386 128.798,69.366 128.798,63.883 128.905,63.776 v1(128.905,63.627) ; v1(129.286,59.182) 131.318,57.15 137.541,57.15 145.697,65.306 U100.53
  L4(SIG) w0.15: v1(128.905,63.627) 128.905,63.576 129.286,63.195 v1(129.286,59.182)
CDONE: R203.2 U100.43 U201.8 | length 33.2
  L1(SIG) w0.15: U201.8 126.226,67.322 127.508,66.04 127.508,63.527 128.721,62.314 129.035,62.314 132.675,58.674 136.6,58.674 138.987,61.061 138.987,70.788 139.847,71.648 U100.43
CRESET: R204.2 U100.44 U201.7 | length 34.6
  L1(SIG) w0.15: U201.7 125.726,66.806 126.746,65.786 126.746,62.992 128.016,61.722 128.27,61.722 132.08,57.912 137.143,57.912 139.664,60.433 139.664,70.195 140.617,71.148 U100.44
FIFO_CLKOUT: R102.1 U100.32 | length 1.1
  L1(SIG) w0.15: R102.1 142.625,78.498 U100.32
FPGA_CLKOUT: R102.2 U201.20 | length 15.1
  L1(SIG) w0.15: U201.20 131.433,72.886 137.033,78.486 R102.2
FPGA_D0: U100.16 U201.34 | length 49.4
  L1(SIG) w0.15: U201.34 123.726,76.426 123.317,76.835 123.317,80.391 133.35,90.424 147.447,90.424 153.047,84.824 U100.16
FPGA_D1: U100.17 U201.32 | length 43.1
  L1(SIG) w0.15: U201.32 124.726,78.093 124.46,78.359 124.46,80.264 133.35,89.154 146.304,89.154 151.197,84.261 U100.17
FPGA_D2: U100.18 U201.31 | length 39.4
  L1(SIG) w0.15: U201.31 125.226,75.83 125.204,75.852 125.204,79.23 133.985,88.011 145.542,88.011 150.697,82.856 U100.18
FPGA_D3: U100.19 U201.28 | length 34.7
  L1(SIG) w0.15: U201.28 126.726,76.581 126.805,76.66 126.805,77.402 136.652,87.249 144.399,87.249 150.168,81.48 150.168,78.527 U100.19
FPGA_D4: U100.21 U201.27 | length 31.9
  L1(SIG) w0.15: U201.27 127.226,76.553 136.906,86.233 144.399,86.233 149.197,81.435 U100.21
FPGA_D5: U100.22 U201.26 | length 29.5
  L1(SIG) w0.15: U201.26 127.734,75.519 127.734,76.045 136.906,85.217 144.399,85.217 148.697,80.919 U100.22
FPGA_D6: U100.23 U201.25 | length 27.1
  L1(SIG) w0.15: U201.25 128.226,75.545 128.246,75.565 128.651,75.565 137.16,84.074 144.78,84.074 148.197,80.657 U100.23
FPGA_D7: U100.24 U201.23 | length 25.4
  L1(SIG) w0.15: U201.23 129.636,74.386 138.435,83.185 144.653,83.185 147.697,80.141 U100.24
GND: C1.1 C2.1 C3.1 C4.1 C5.1 C6.2 C7.1 C8.1 C9.1 C10.2 C11.1 C12.1 C13.1 C14.2 C100.1 C101.1 C102.1 C103.1 C104.1 C105.1 C106.1 C107.1 C108.1 C109.1 C110.1 C111.1 C112.1 C113.1 C200.1 C201.1 C202.1 C203.1 C204.1 C205.1 C206.1 C207.1 C208.1 C209.1 C210.1 C211.1 C212.1 C213.1 C214.1 C215.2 C216.1 C217.1 J1.5 R3.1 R6.1 R9.1 R101.2 U1.6 U1.7 U1.8 U1.15 U1.16 U1.17@150.368,42.672 U2.4 U3.6 U3.7 U3.8 U3.15 U3.16 U3.17@169.545,51.562 U4.6 U4.7 U4.8 U4.15 U4.16 U4.17@168.51,108.709 U100.1 U100.5 U100.10 U100.11 U100.13 U100.15 U100.25 U100.35 U100.47 U100.51 U101.2 U200.4 U201.49 U202.4 U203.4 X100.2 X200.2 | length 65
  L1(SIG) w0.3: C102.1@139.877,75.811 139.9,75.788 140.112,75.788 140.252,75.648 U100.35 ; U100.47 143.458,69.648 v1(143.51,69.596) ; 142.875,68.326 143.453,68.904 v1@143.453,69.539 ; v1(144.653,69.215) 144.697,69.171 U100.51 ; v1(147.193,75.819) 147.197,75.823 U100.25 ; v1(150.749,74.803) 150.857,74.803 151.202,75.148 U100.13 ; v1(151.482,76.137) 151.493,76.148 U100.15 ; U100.1 153.416,69.148 v1(153.416,68.326) ; U100.5 157.648,71.148 158.446,70.35 C110.1 ; U2.4 168.187,75.077
  L1(SIG) w0.35: 142.508,68.326 142.875,68.326 ; 168.187,75.077 168.421,75.311
  L1(SIG) w0.4: U200.4 U200.4@136.522,62.138 ; v1@136.522,63.751 v1(136.525,63.754) ; v1(138.684,75.946) 138.688,75.942 139.823,75.942 C102.1 ; C111.1 141.943,67.259 141.943,67.761 142.508,68.326 ; v1@143.453,69.539 v1(143.51,69.596) ; 168.421,75.311 170.688,75.311 171.801,74.198 J1.5
  L1(SIG) w0.5: v1(112.776,68.072) U202.4 ; U203.4 v1(120.777,59.563) ; v1(150.306,62.348) 150.31,62.353 151.504,62.353 U101.2 ; X100.2 156.554,69.074 156.704,68.924 156.996,68.924 157.556,68.364 157.823,68.364 v1(157.861,68.326) C113.1
  L1(SIG) w0.6: v1(119.634,84.074) 119.642,84.066 119.642,83.04 118.727,83.04 118.11,82.423 118.11,79.091 118.461,78.74 X200.2 ; U200.4@136.522,62.138 v1@136.522,63.751
  L4(SIG) w0.5: v1(112.776,68.072) 112.814,68.034 112.814,67.78 C212.1 ; v1(120.777,59.563) 121.947,60.733 121.947,61.481 121.983,61.516 121.983,61.587 C216.1 ; C205.1 C206.1 123.255,69.842 123.39,69.977 v1(123.444,69.977) v1(125.476,69.977)
  L4(SIG) w0.6: v1(136.525,63.754) C112.1@136.525,64.905 ; v1(143.51,69.596) 143.529,69.615 143.598,69.615 144.222,70.239 C106.1 ; v1(144.653,69.215) 144.68,69.215 144.757,69.292 145.423,69.292 C107.1 ; C108.1 145.28,75.488 145.33,75.488 145.661,75.819 v1(147.193,75.819) ; v1(148.463,71.628) R101.2 ; C103.1 150.741,74.795 v1(150.749,74.803) ; C105.1 150.741,75.996 151.314,75.996 151.455,76.137 v1(151.482,76.137) ; v1(153.416,68.326) 153.416,68.299 153.662,68.053 C104.1
  other v1: 150.241,36.83 151.638,36.83 153.162,36.83 154.432,36.83 148.971,40.513 154.051,45.085 169.418,45.593 170.815,45.593 172.339,45.593 173.609,45.593 168.148,49.403 173.293,53.967 168.91,67.183 170.307,67.183 127.508,69.977 158.496,71.12 160.02,71.12 123.444,72.136 125.476,72.136 127.508,72.136 123.444,74.168 125.476,74.168 127.508,74.168 157.607,75.946 159.004,75.946 168.256,102.74 169.653,102.74 171.177,102.74 172.447,102.74 167.113,106.55 172.212,111.125
  other v2: 149.868,42.172 150.868,42.172 150.368,42.672 149.868,43.172 150.868,43.172 169.045,51.062 170.045,51.062 169.545,51.562 169.045,52.062 170.045,52.062 168.01,108.209 169.01,108.209 168.51,108.709 168.01,109.209 169.01,109.209
NetC6_1: C6.1 U1.9 | length 2.8
  L4(SIG) w0.25: U1.9 151.943,43.422 151.943,43.597 152.519,44.173 C6.1
NetC10_1: C10.1 U3.9 | length 2.8
  L4(SIG) w0.25: U3.9 171.12,52.312 171.12,52.487 171.696,53.063 C10.1@171.696,54.737
NetC14_1: C14.1 U4.9 | length 2.8
  L4(SIG) w0.25: U4.9 170.085,109.459 170.085,109.634 170.661,110.21 C14.1@170.661,111.884
NetC100_2: C100.2 C101.2 FB100.2 U100.9 | length 8.1
  L1(SIG) w0.25: U100.9 155.444,73.148
  L1(SIG) w0.3: 155.444,73.148 156.337,74.041
  L1(SIG) w0.5: 156.337,74.041 157.472,74.041 C101.2 C100.2 159.006,74.051 160.78,74.051 FB100.2
NetC109_2: C109.2 C110.2 FB101.2 U100.4 | length 9.4
  L1(SIG) w0.3: U100.4 156.936,70.648 158.084,69.5 158.346,69.5 C110.2
  L1(SIG) w0.6: C110.2 160.378,69.35 160.909,68.819 161.571,68.819 FB101.2
NetC210_2: C210.2 C211.2 R205.2 U201.29 | length 5
  L1(SIG) w0.15: U201.29 126.226,77.413 v3(126.283,77.47)
  L4(SIG) w0.6: C210.2 C211.2 R205.2
NetD200_1: D200.1 R207.2 | length 9.8
  L1(SIG) w0.25: D200.1 113.821,75.573 112.704,75.573 111.76,74.629 111.76,73.326 112.442,72.644 116.768,72.644 117.051,72.927 117.101,72.927 117.276,73.102 R207.2
NetD200_2: D200.2 R208.2 | length 2.4
  L1(SIG) w0.25: D200.2 115.698,76.2 R208.2
NetD200_3: D200.3 R210.2 | length 2.6
  L1(SIG) w0.25: D200.3 116.024,74.676 R210.2
NetL1_1: L1.1 U1.1 U1.2 U1.3
NetL2_1: L2.1 U3.1 U3.2 U3.3
NetL3_1: L3.1 U4.1 U4.2 U4.3
NetR1_1: R1.1 U1.4 U3.13 | length 4.6
  L4(SIG) w0.25: R1.1 148.273,43.942 148.793,43.422 U1.4 ; U3.13@170.295,50.224 U3.13 170.649,50.162 171.704,49.107 v1(171.704,49.022)
  other v1: 147.828,43.942
NetR2_1: R2.1 R3.2 U1.5 | length 3
  L4(SIG) w0.25: R2.1 147.951,45.47 149.475,45.47 R3.2 149.479,44.799 149.618,44.66 U1.5
NetR4_1: R4.1 U3.4 U4.13 | length 4.5
  L4(SIG) w0.25: R4.1@165.727,52.832 167.45,52.832 167.97,52.312 U3.4 ; U4.13 169.26,107.246 169.614,107.246 170.329,106.531 170.329,106.255 v1(170.415,106.169)
  other v1: 167.005,52.832
NetR5_1: R5.1 R6.2 U3.5 | length 3
  L4(SIG) w0.25: R5.1@167.124,54.356 167.128,54.36 168.652,54.36 168.656,54.364 168.656,53.689 168.795,53.55 U3.5
NetR8_1: R8.1 R9.2 U4.5 | length 3
  L4(SIG) w0.25: R8.1 166.108,111.483 167.617,111.483 R9.2 167.76,111.34 U4.5
NetR100_1: R100.1 U100.14 | length 2.2
  L1(SIG) w0.3: U100.14 154.965,75.648 155.144,75.827 R100.1@155.194,75.827
NetR101_1: R101.1 U100.6 | length 2.6
  L1(SIG) w0.3: v1(151.384,71.628) 151.404,71.648 U100.6
  L4(SIG) w0.6: R101.1 v1(151.384,71.628)
NetR103_2: R103.2 U100.63 U101.5 | length 11.3
  L1(SIG) w0.15: U100.63 150.723,67.272 150.723,66.193 151.384,65.532 154.686,65.532 156.345,63.873 R103.2 U101.5
NetR104_2: R104.2 U100.62 U101.4 | length 8.8
  L1(SIG) w0.15: U100.62 150.197,65.857 151.186,64.868 152.439,64.868 153.233,64.074 153.233,61.651 153.477,61.407 U101.4
NetR105_2: R105.2 R106.1 U101.1 | length 5.4
  L1(SIG) w0.15: R105.2 147.749,63.032 147.749,63.294 147.949,63.494 149.612,63.494 149.799,63.307 ; R106.1 149.08,62.966 149.458,62.966 149.799,63.307 ; U101.1 149.799,63.307
NetR106_2: R106.2 U100.61 U101.3 | length 11.5
  L1(SIG) w0.15: R106.2 149.021,61.857 149.471,61.407 U101.3 151.618,61.517 152.195,61.517 152.582,61.904 152.582,63.807 152.179,64.21 150.674,64.21 149.697,65.187 U100.61
NetR200_1: R200.1 U200.7 | length 3
  L1(SIG) w0.6: U200.7 133.982,69.432 133.982,67.948 v1(133.985,67.945)
  L4(SIG) w0.6: v1(133.985,67.945) 134.004,67.926 134.357,67.926 134.739,67.544 R200.1@134.739,66.979
NetR201_1: R201.1 U200.3 | length 3
  L1(SIG) w0.4: U200.3 U200.3@135.252,62.138 ; v1@135.252,63.751 v1(135.255,63.754)
  L1(SIG) w0.6: U200.3@135.252,62.138 v1@135.252,63.751
  L4(SIG) w0.4: R201.1 134.924,64.905 135.024,64.805 135.024,64.755 135.198,64.581 135.198,63.811 v1(135.255,63.754)
NetU100_2: U100.2 X100.3 | length 2.3
  L1(SIG) w0.3: U100.2 154.63,69.648 155.104,69.174 X100.3
NetU201_35: U201.35 X200.3 | length 3.8
  L1(SIG) w0.15: X200.3 121.788,77.602 123.226,76.164 U201.35
NOE: U100.33 U201.18 | length 15
  L1(SIG) w0.15: U201.18 132.47,71.886 137.232,76.648 U100.33
NRD: U100.28 U201.37 | length 1.1
  L1(SIG) w0.15: v3(121.031,74.93) 121.067,74.894 122.093,74.894 U201.37
NRXF: U100.26 U201.36 | length 1.3
  L1(SIG) w0.15: v3(121.666,76.073) 122.228,75.511 U201.36
NTXE: U100.27 U201.21 | length 23.8
  L1(SIG) w0.15: U201.21 130.79,73.386 131.826,74.422 131.826,75.057 138.938,82.169 144.018,82.169 146.197,79.99 U100.27
NWR: U100.29 U201.19 | length 21.6
  L1(SIG) w0.15: U201.19 128.855,72.39 131.953,72.39 136.906,77.343 143.002,77.343 143.51,76.835 143.51,76.327 143.891,75.946 144.78,75.946 145.197,76.363 U100.29
RGB_B: R210.1 U201.40 | length 4.4
  L1(SIG) w0.15: R210.1 118.417,74.535 118.759,74.535 119.908,73.386 U201.40
RGB_G: R208.1 U201.39 | length 4.8
  L1(SIG) w0.15: R208.1 118.276,76.15 120.54,73.886 U201.39
RGB_R: R207.1 U201.41 | length 3.9
  L1(SIG) w0.15: R207.1 118.326,73.102 118.922,73.102 119.123,72.901 121.748,72.901 121.755,72.894 122.093,72.894 U201.41
SPDT_IN: U100.48
SPI_CS: R202.1 U100.41 U200.1 U201.16 | length 35.2
  L1(SIG) w0.15: U201.16 130.917,70.886 v1(131.445,70.358) ; v1(130.683,62.738) 131.318,62.738 131.921,62.135 U200.1 132.709,60.445 133.591,59.563 136.144,59.563 138.303,61.722 138.303,71.247 139.704,72.648 U100.41
  L4(SIG) w0.15: v1(130.683,62.738) 130.683,69.596 v1(131.445,70.358)
SPI_DI: U100.40 U200.2 U201.17 | length 34.9
  L1(SIG) w0.15: U201.17 128.857,71.38 133.471,71.38 v1(133.477,71.374) ; v1(133.985,60.452) 133.982,60.455 133.982,62.132 U200.2 133.979,63.875 137.541,67.437 137.541,71.501 139.188,73.148 U100.40
  L4(SIG) w0.15: v1(133.477,71.374) 133.41,71.307 133.41,70.799 131.572,68.961 131.572,66.548 131.826,66.294 131.826,62.611 v1(133.985,60.452)
SPI_DO: U100.39 U200.5 U201.14 | length 20.9
  L1(SIG) w0.15: U201.14 129.377,69.886 130.556,68.707 130.556,67.31 131.953,65.913 134.366,65.913 136.461,68.008 136.461,69.377 U200.5 136.519,71.876 138.291,73.648 U100.39
SPI_SK: U100.38 U200.6 U201.15 | length 20.9
  L1(SIG) w0.15: U201.15 129.893,70.386 131.445,68.834 131.445,67.437 132.207,66.675 133.985,66.675 135.153,67.843 135.153,69.339 U200.6 135.249,72.13 137.267,74.148 U100.38
USB_D_N: J1.2 U2.2 U2.5 U100.7
USB_D_P: J1.3 U2.3 U100.8
pads on no net: J1.4 J1.6 J1.7 J1.8 J1.9 J1.10 J1.11 U1.17@150.368,42.672 U3.17@169.545,51.562 U4.4 U4.17@168.51,108.709 U100.3 U100.34 U100.36 U100.45 U100.46 U100.52 U100.54 U100.55 U100.57 U100.58 U100.59 U100.60 U201.10 U201.11 U201.12 U201.38

## Polygon pours and split planes (outlines as drawn)
GND on L1(SIG) "GND_L01_P029" (solid, pour order 29): 157.648,71.148 158.001,71.501 160.274,71.501 160.401,71.374 160.401,70.104 160.274,69.977 158.242,69.977 157.947,70.272 157.947,70.842
GND on L1(SIG) "GND_L01_P028" (solid, pour order 28): 152.146,73.533 152.019,73.66 152.019,74.168 152.146,74.295 154.94,74.295 155.956,75.311 157.099,75.311 157.226,75.438 157.226,76.2 157.353,76.327 159.258,76.327 159.385,76.2 159.385,74.803 159.258,74.676 156.083,74.676 154.94,73.533
+5V on L1(SIG) "+5V_L01_P003" (solid, pour order 3): 169.418,71.247 169.418,70.485 169.164,70.231 169.164,68.961 169.037,68.834 165.481,68.834 165.354,68.961 165.354,71.247 165.481,71.374 169.291,71.374
GND on L1(SIG) "GND_L01_P002" (solid, pour order 2): 170.815,68.453 170.688,68.58 168.529,68.58 168.402,68.453 168.402,66.802 168.529,66.675 170.688,66.675 170.815,66.802
+VBUS on L1(SIG) "+VBUS_L01_P000" (solid, pour order 0): 170.18,68.834 170.063,68.951 170.063,70.231 169.926,70.485 169.926,71.369 170.063,71.628 170.063,72.761 169.685,73.139 169.685,73.436 170.104,73.436 171.722,71.819 174.044,71.819 174.044,71.369 172.67,71.369 172.67,71.365 170.815,69.51 170.815,68.961 170.688,68.834
GND on L4(SIG) "GND_L04_P033" (solid, pour order 33): 127.254,73.787 125.222,73.787 125.095,73.914 125.095,74.422 125.222,74.549 127.254,74.549 127.381,74.676
GND on L4(SIG) "GND_L04_P032" (solid, pour order 32): 129.54,78.359 128.905,78.359 128.27,77.724 127.635,77.724 127.635,74.93 127.127,74.422 127.127,73.914 127.254,73.787 127.762,73.787 127.889,73.914 127.889,74.422 129.54,76.327
+3v3 on L4(SIG) "+3V3_L04_P030" (solid, pour order 30): 122.047,67.437 122.301,67.691 122.301,67.818 122.301,68.199 122.682,68.58 122.682,69.088 122.555,69.215 120.777,69.215 120.65,69.088 120.65,68.58 121.793,67.437
NetC210_2 on L4(SIG) "NETC210_2_L04_P031" (solid, pour order 31): 125.984,77.597 126.18,77.793 126.434,77.793 126.746,78.105 126.746,76.835 126.417,77.164 126.163,77.164 125.984,77.343
GND on L4(SIG) "GND_L04_P013" (solid, pour order 13): 168.995,51.065 168.701,50.77 168.701,50.59 167.643,49.532 167.643,49.151 168.532,48.262 168.532,45.976 168.532,45.468 168.913,45.087 173.866,45.087 174.247,45.468 174.247,48.262 174.12,48.389 170.056,48.389 169.421,49.024 169.421,50.638 169.844,51.061
NetL2_1 on L4(SIG) "NETL2_1_L04_P014" (solid, pour order 14): 168.529,51.816 168.402,51.943 162.814,51.943 162.179,51.308 162.179,49.911 162.433,49.657 165.481,49.657 166.497,50.673 168.402,50.673 168.529,50.8
+5V on L4(SIG) "+5V_L04_P017" (solid, pour order 17): 171.577,50.546 170.688,50.546 170.604,50.63 170.604,51.478 170.688,51.562 171.577,51.562 172.466,50.673 174.117,50.673 174.244,50.546 174.244,49.276 174.117,49.149 172.593,49.149 171.958,49.911
no net on L4(SIG) "NONET_L04_P025" (solid, pour order 25): 170.398,52.075 170.398,52.245 170.398,52.569 170.44,52.611 170.44,53.881 171.075,54.389 171.075,54.897 170.948,55.024 170.186,55.024 169.932,55.532 169.805,55.659 168.408,55.659 168.281,55.532 168.281,55.024 168.408,54.897 169.043,54.897 169.551,54.897 169.932,54.516 169.932,54.008 169.17,53.246 169.17,52.438 168.789,52.103
GND on L4(SIG) "GND_L04_P026" (solid, pour order 26): 173.039,52.697 172.785,52.951 172.785,54.221 173.039,54.475 173.547,54.475 173.801,54.221 173.801,52.951 173.547,52.697
GND on L4(SIG) "GND_L04_P027" (solid, pour order 27): 171.958,109.855 171.704,110.109 171.704,111.379 171.958,111.633 172.466,111.633 172.72,111.379 172.72,110.109 172.466,109.855
GND on L4(SIG) "GND_L04_P010" (solid, pour order 10): 153.797,43.815 153.543,44.069 153.543,45.339 153.797,45.593 154.305,45.593 154.559,45.339 154.559,44.069 154.305,43.815
GND on L4(SIG) "GND_L04_P021" (solid, pour order 21): 169.36,109.272 169.36,109.442 169.36,109.766 169.402,109.808 169.402,111.078 170.037,111.586 170.037,112.094 169.91,112.221 169.148,112.221 168.894,112.729 168.767,112.856 167.37,112.856 167.243,112.729 167.243,112.221 167.37,112.094 168.005,112.094 168.513,112.094 168.894,111.713 168.894,111.205 168.132,110.443 168.132,109.635 167.751,109.3
+5V on L4(SIG) "+5V_L04_P024" (solid, pour order 24): 170.57,107.672 169.681,107.672 169.597,107.756 169.597,108.604 169.681,108.688 170.57,108.688 171.459,107.799 173.11,107.799 173.237,107.672 173.237,106.402 173.11,106.275 171.586,106.275 170.951,107.037
GND on L4(SIG) "GND_L04_P020" (solid, pour order 20): 167.977,108.206 167.683,107.911 167.683,107.731 166.625,106.673 166.625,106.292 167.514,105.403 167.514,103.117 167.514,102.609 167.895,102.228 172.848,102.228 173.229,102.609 173.229,105.403 173.102,105.53 169.038,105.53 168.403,106.165 168.403,107.779 168.827,108.202
NetL3_1 on L4(SIG) "NETL3_1_L04_P019" (solid, pour order 19): 167.494,108.963 167.367,109.09 161.779,109.09 161.144,108.455 161.144,107.058 161.398,106.804 164.446,106.804 165.462,107.82 167.367,107.82 167.494,107.947
GND on L4(SIG) "GND_L04_P009" (solid, pour order 9): 151.215,43.279 151.215,43.45 151.215,43.773 151.257,43.815 151.257,45.085 151.892,45.593 151.892,46.101 151.765,46.228 151.003,46.228 150.749,46.736 150.622,46.863 149.225,46.863 149.098,46.736 149.098,46.228 149.225,46.101 149.86,46.101 150.368,46.101 150.749,45.72 150.749,45.212 149.987,44.45 149.987,43.642 149.606,43.307
NetL1_1 on L4(SIG) "NETL1_1_L04_P008" (solid, pour order 8): 149.352,42.926 149.225,43.053 143.637,43.053 143.002,42.418 143.002,41.021 143.256,40.767 146.304,40.767 147.32,41.783 149.225,41.783 149.352,41.91
+5V on L4(SIG) "+5V_L04_P007" (solid, pour order 7): 151.384,41.783 151.384,41.91 151.384,42.545 151.511,42.672 152.4,42.672 153.289,41.783 154.94,41.783 155.067,41.656 155.067,40.386 154.94,40.259 153.416,40.259 152.781,40.894 151.027,40.894 150.947,40.974 150.947,41.524 151.078,41.656 151.257,41.656
GND on L4(SIG) "GND_L04_P005" (solid, pour order 5): 149.815,42.172 149.521,41.878 149.521,41.698 148.463,40.64 148.463,40.259 149.352,39.37 149.352,37.084 149.352,36.576 149.733,36.195 154.686,36.195 155.067,36.576 155.067,39.37 154.94,39.497 150.876,39.497 150.241,40.132 150.241,41.745 150.665,42.169

## Text inside footprints (layer, text, board x,y; h text height)
D200: Top Overlay "+" at 113.474,72.543 h1 r90; Mechanical 13 "+" at 112.974,72.093 h1 r90
U202: Top Overlay "*" at 117.018,70.174 h1.27 r270; Mechanical 13 "*" at 115.837,68.859 h1.27 r270
U203: Top Overlay "*" at 118.675,63.805 h1.27; Mechanical 13 "*" at 119.99,62.624 h1.27